# Altium PCB FPW1-0-2.PcbDoc (part 9 of 11)
Units mm, origin at the board's own origin, x right, y up, seen from the top; angles counter-clockwise.
Board outline 85 x 56 mm, 4 copper layers (Top Layer, GND_Plane, 3V3_Plane, Bottom Layer); 182 components, 321 nets, 1106 pads, 360 vias.
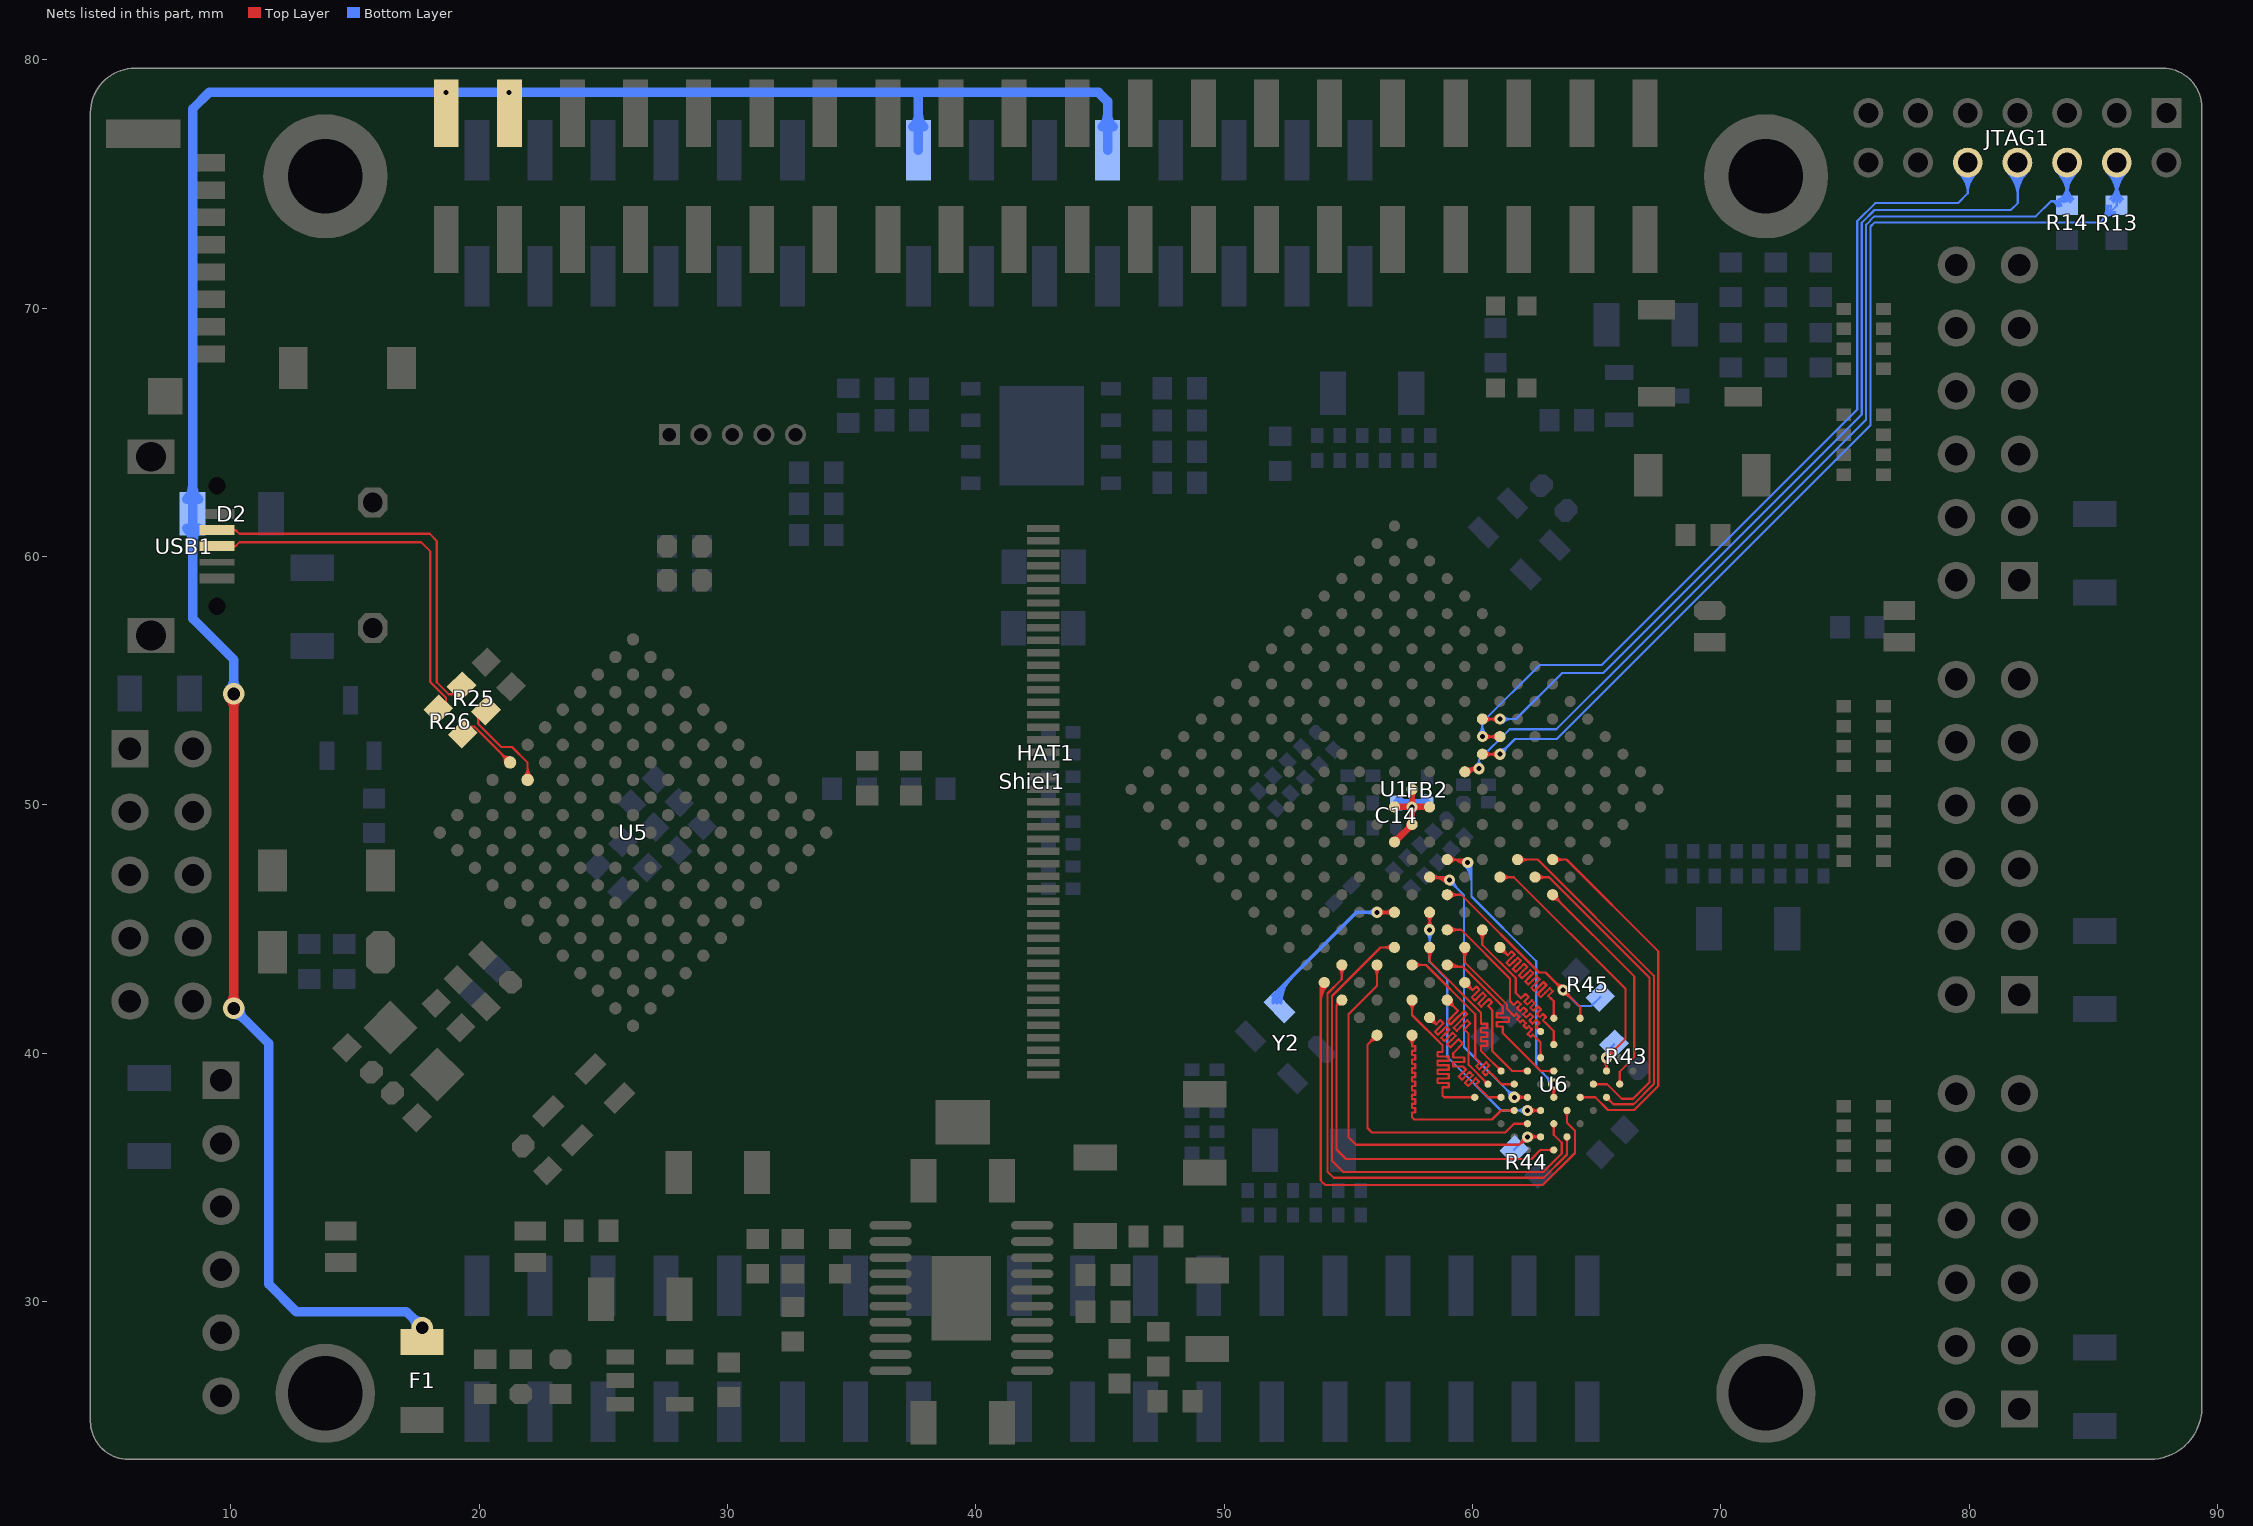
[diagram p11: the nets of this part, all layers, seen from the top]

## Via types
v1: diameter 0.45, hole 0.2, Top Layer to Bottom Layer, tented both sides, 280 vias
v2: diameter 0.61, hole 0.33, Top Layer to Bottom Layer, tented both sides, 40 vias
v3: diameter 0.403, hole 0.2, Top Layer to Bottom Layer, tented both sides, 15 vias
v4: diameter 0.5, hole 0.2, Top Layer to Bottom Layer, tented both sides, 12 vias
v5: diameter 0.864, hole 0.508, Top Layer to Bottom Layer, tented both sides, 11 vias
v6: diameter 0.864, hole 0.356, Top Layer to Bottom Layer, tented both sides, 1 vias
v7: diameter 0.864, hole 0.381, Top Layer to Bottom Layer, tented both sides, 1 vias

## Nets (pads, with @x,y where several pads share a name; then routed paths per layer and width w, separated by ;. In a path a pad name is that pad's centre, name@x,y a point inside that pad or via, vN(x,y) a via of type N, cw(c..) or ccw(c..) an arc to the next point about the centre after c; other vN are vias at no path point) (continued)
SRAM-A12: U1.B1 U6.G3 | length 11.2
  Top Layer w0.089: U1.B1@57.438,40.603 cw(c57.13,40.295) 57.565,40.295 cw(c58.001,40.295) U1.B1@57.693,40.603 ; U1.B1@57.565,40.731 57.565,40.642 57.565,40.464 ; U6.G3@61.609,37.629 ccw(c61.438,37.457) 61.438,37.7 ccw(c61.438,37.942) U6.G3@61.609,37.771 ; U6.G3@61.68,37.7 61.144,37.7 60.785,37.341 57.772,37.341 57.744,37.341 57.655,37.341 57.565,37.431 57.565,37.442 57.565,37.619 57.692,37.619 57.692,37.797 57.565,37.797 57.565,37.975 57.692,37.975 57.692,38.153 57.565,38.153 57.565,38.331 57.692,38.331 57.692,38.508 57.565,38.508 57.565,38.686 57.692,38.686 57.692,38.864 57.565,38.864 57.565,39.042 57.692,39.042 57.692,39.22 57.565,39.22 57.565,39.397 57.692,39.397 57.692,39.575 57.565,39.575 57.565,39.753 57.692,39.753 57.692,39.931 57.565,39.931 57.565,40.109 57.692,40.109 57.692,40.286 57.565,40.286 57.565,40.464 ; 57.565,40.464 cw(c57.672,40.464) 57.632,40.563 ccw(c57.672,40.464) 57.565,40.464 ; 57.565,40.464 ccw(c57.459,40.464) 57.498,40.563 cw(c57.459,40.464) 57.565,40.464
SRAM-A13: U1.A2 U6.G4 | length 11.6
  Top Layer w0.089: U1.A2@55.971,40.731 cw(c55.535,40.731) 55.843,40.423 cw(c56.151,40.114) U1.A2@56.151,40.55 ; U1.A2@56.151,40.731 55.767,40.347 55.767,36.993 55.944,36.817 61.316,36.817 61.668,37.169 U6.G4@62.211,37.169 ; U6.G4@62.14,37.098 ccw(c61.968,36.927) 61.968,37.169 ccw(c61.968,37.412) U6.G4@62.14,37.241
SRAM-A14: U1.G5 U6.F3 | length 16
  Top Layer w0.089: U1.G5@58.273,47.095 58.95,47.095 v1(59.068,46.977) ; U1.G5@58.348,47.095 cw(c58.348,46.258) v1@58.94,46.85 ; U1.G5@58.4,46.967 cw(c58.708,46.659) 58.708,47.095 cw(c58.708,47.531) U1.G5@58.4,47.223 ; 58.563,47.095 cw(c58.563,46.472) v1@59.003,46.912 ; 58.777,47.095 cw(c58.777,46.687) v1@59.066,46.975 ; v1(61.68,38.23) U6.F3@62.211,38.23 ; v1@61.808,38.102 cw(c62.116,37.794) 62.116,38.23 cw(c62.116,38.666) v1@61.808,38.358 ; U6.F3@62.14,38.159 ccw(c61.968,37.987) 61.968,38.23 ccw(c61.968,38.473) U6.F3@62.14,38.301
  Bottom Layer w0.089: v1@59.056,46.966 59.652,46.37 59.652,40.259 v1(61.68,38.23) ; v1@59.068,46.797 cw(c59.068,46.416) 59.337,46.685 ; v1@59.159,46.977 ccw(c59.436,46.977) 59.24,46.782 ; v1@59.248,46.977 ccw(c59.739,46.977) 59.392,46.63 ; v1@61.5,38.23 ccw(c61.064,38.23) 61.372,38.538 ccw(c61.68,38.847) v1@61.68,38.411
SRAM-A15: U1.F4 U6.F4 | length 14.6
  Top Layer w0.089: v1@58.145,45.101 ccw(c57.837,45.409) 58.273,45.409 ccw(c58.708,45.409) v1@58.4,45.101 ; U1.F4@58.145,45.553 cw(c57.837,45.245) 58.273,45.245 cw(c58.708,45.245) U1.F4@58.4,45.553 ; v1(58.273,44.974) U1.F4@58.273,45.681 ; v1(62.211,37.7) U6.F4@62.741,37.7 ; v1@62.338,37.572 cw(c62.647,37.264) 62.647,37.7 cw(c62.647,38.136) v1@62.338,37.827 ; U6.F4@62.67,37.629 ccw(c62.498,37.457) 62.498,37.7 ccw(c62.498,37.942) U6.F4@62.67,37.771
  Bottom Layer w0.089: v1@58.145,44.846 cw(c57.837,44.538) 58.273,44.538 cw(c58.708,44.538) v1@58.4,44.846 ; v1(58.273,44.974) 58.273,43.683 58.98,42.976 58.98,39.864 61.144,37.7 v1(62.211,37.7) ; v1@62.083,37.572 ccw(c61.775,37.264) 61.775,37.7 ccw(c61.775,38.136) v1@62.083,37.827
SRAM-A16: U1.H5 U6.E4 | length 17.4
  Top Layer w0.089: U1.H5@58.98,47.802 59.691,47.802 v1(59.804,47.688) ; U1.H5@59.095,47.802 cw(c59.095,46.979) v1@59.677,47.561 ; U1.H5@59.107,47.674 cw(c59.416,47.366) 59.416,47.802 cw(c59.416,48.238) U1.H5@59.107,47.93 ; 59.309,47.802 cw(c59.309,47.193) v1@59.739,47.624 ; 59.524,47.802 cw(c59.524,47.408) v1@59.802,47.687 ; v1@63.144,38.633 cw(c62.836,38.325) 63.271,38.325 cw(c63.707,38.325) v1@63.399,38.633 ; U6.E4@63.2,38.301 ccw(c63.029,38.473) 63.271,38.473 ccw(c63.514,38.473) U6.E4@63.343,38.301 ; U6.E4@63.271,38.23 v1(63.271,38.76)
  Bottom Layer w0.089: v1@59.677,47.561 cw(c59,46.885) 59.957,46.885 ; v1@59.739,47.624 cw(c59.215,47.099) 59.957,47.099 ; v1@59.802,47.687 cw(c59.43,47.314) 59.957,47.314 ; v1(59.804,47.688) 59.957,47.536 59.957,46.317 62.56,43.713 62.56,39.472 v1(63.271,38.76) ; v1@63.091,38.76 ccw(c62.655,38.76) 62.963,39.069 ccw(c63.271,39.377) v1@63.271,38.941
SRAM-A17: U1.E2 U6.D3 | length 9.6
  Top Layer w0.089: U1.E2@58.98,43.559 59.052,43.487 59.613,43.487 61.214,41.886 61.214,41.797 61.214,41.619 60.973,41.619 60.973,41.441 61.468,41.441 61.468,41.263 60.973,41.263 60.973,41.086 61.214,41.086 61.214,40.818 62.741,39.291 U6.D3@63.271,39.291 ; U1.E2@59.044,43.624 ccw(c59.377,43.956) 59.377,43.487 ; U1.E2@59.107,43.432 cw(c59.24,43.299) 59.24,43.487 ; U1.E2@59.107,43.687 ccw(c59.591,44.171) 59.591,43.487 ; U6.D3@63.2,39.22 ccw(c63.029,39.048) 63.029,39.291 ccw(c63.029,39.533) U6.D3@63.2,39.362
SRAM-A18: U1.C2 U6.H1 | length 10.4
  Top Layer w0.089: U1.C2@57.438,42.017 cw(c57.13,41.709) 57.565,41.709 cw(c58.001,41.709) U1.C2@57.693,42.017 ; U1.C2@57.565,42.145 57.565,41.545 58.788,40.322 58.788,40.056 58.585,40.056 58.585,39.878 59.042,39.878 59.042,39.7 58.585,39.7 58.585,39.522 59.042,39.522 59.042,39.345 58.585,39.345 58.585,39.167 59.042,39.167 59.042,38.989 58.585,38.989 58.585,38.811 59.042,38.811 59.042,38.633 58.788,38.633 58.788,38.303 58.861,38.23 U6.H1@60.089,38.23 ; U6.H1@60.018,38.159 ccw(c59.847,37.987) 59.847,38.23 ccw(c59.847,38.473) U6.H1@60.018,38.301
SRAM-A19: U1.C1 U6.G2 | length 12
  Top Layer w0.089: U1.C1@58.273,41.438 58.535,41.175 ; U1.C1@58.294,41.259 cw(c58.329,40.969) 58.535,41.175 ; U1.C1@58.452,41.416 ccw(c58.741,41.382) 58.535,41.175 ; U6.G2@61.079,38.159 ccw(c60.907,37.987) 60.907,38.23 ccw(c60.907,38.473) U6.G2@61.079,38.301 ; U6.G2@61.15,38.23 60.639,38.23 60.127,38.742 60.257,38.872 60.131,38.997 60.002,38.868 59.822,38.688 59.696,38.814 60.006,39.123 59.88,39.249 59.75,39.119 59.571,38.94 59.445,39.065 59.733,39.353 59.611,39.474 59.22,39.474 59.22,39.652 59.665,39.652 59.665,39.83 59.22,39.83 59.22,40.008 59.608,40.396 59.436,40.568 59.11,40.242 58.984,40.367 59.164,40.547 59.321,40.704 59.195,40.829 59.038,40.673 58.864,40.498 58.738,40.624 58.912,40.798 59.069,40.955 58.943,41.081 58.787,40.924 58.612,40.75 58.487,40.876 58.826,41.215 58.7,41.341 58.535,41.175
SRAM-DQ0: U1.K1 U6.B6 | length 10.3
  Top Layer w0.089: U1.K1@63.222,46.207 cw(c63.222,45.771) 63.53,46.08 cw(c63.839,46.388) U1.K1@63.403,46.388 ; U1.K1@63.222,46.388 66.51,43.1 66.51,39.853 65.923,39.266 U6.B6@65.923,38.76 ; U6.B6@65.852,38.831 ccw(c65.68,39.003) 65.923,39.003 ccw(c66.166,39.003) U6.B6@65.994,38.831
SRAM-DQ1: U1.K2 U6.C5 | length 14.3
  Top Layer w0.089: U1.K2@62.515,47.095 63.076,47.095 67.122,43.048 67.122,38.837 66.461,38.176 66.002,38.176 65.418,38.76 U6.C5@64.862,38.76 ; U1.K2@62.643,46.967 cw(c62.951,46.659) 62.951,47.095 cw(c62.951,47.531) U1.K2@62.643,47.223 ; U6.C5@64.933,38.689 cw(c65.105,38.518) 65.105,38.76 cw(c65.105,39.003) U6.C5@64.933,38.832
SRAM-DQ2: U1.K3 U6.C6 | length 15.2
  Top Layer w0.089: U1.K3@61.808,47.802 62.62,47.802 67.3,43.122 67.3,38.764 66.484,37.948 65.675,37.948 U6.C6@65.393,38.23 ; U1.K3@61.936,47.674 cw(c62.244,47.366) 62.244,47.802 cw(c62.244,48.238) U1.K3@61.936,47.93 ; U6.C6@65.393,38.13 cw(c65.393,37.887) 65.564,38.058 cw(c65.736,38.23) U6.C6@65.493,38.23
SRAM-DQ3: U1.L2 U6.D5 | length 16
  Top Layer w0.089: U1.L2@63.222,47.802 63.783,47.802 67.478,44.107 67.478,38.69 66.507,37.719 65.456,37.719 64.945,38.23 U6.D5@64.332,38.23 ; U1.L2@63.35,47.674 cw(c63.658,47.366) 63.658,47.802 cw(c63.658,48.238) U1.L2@63.35,47.93 ; U6.D5@64.403,38.159 cw(c64.575,37.987) 64.575,38.23 cw(c64.575,38.473) U6.D5@64.403,38.301
SRAM-DQ4: U1.A5 U6.E5 | length 22.8
  Top Layer w0.089: 53.886,42.069 cw(c54.813,42.069) U1.A5@54.158,42.725 ; 53.886,42.284 cw(c54.598,42.284) U1.A5@54.095,42.787 ; 53.886,42.498 cw(c54.384,42.498) U1.A5@54.032,42.85 ; U1.A5@54.03,42.852 53.886,42.708 53.886,34.877 54.066,34.696 62.827,34.696 64.122,35.992 64.122,36.881 63.802,37.201 U6.E5@63.802,37.7 ; U6.E5@63.731,37.629 cw(c63.559,37.457) 63.802,37.457 cw(c64.044,37.457) U6.E5@63.873,37.629
SRAM-DQ5: U1.D4 U6.F5 | length 22.1
  Top Layer w0.089: U1.D4@56.731,44.139 ccw(c56.422,43.831) 56.422,44.266 ccw(c56.422,44.702) U1.D4@56.731,44.394 ; U1.D4@56.858,44.266 56.298,44.266 54.341,42.309 54.341,35.677 54.788,35.23 62.852,35.23 63.588,35.965 63.588,36.405 63.271,36.722 U6.F5@63.271,37.169 ; U6.F5@63.2,37.098 cw(c63.029,36.927) 63.271,36.927 cw(c63.514,36.927) U6.F5@63.342,37.098
SRAM-DQ6: U1.B5 U6.F6 | length 20.5
  Top Layer w0.089: U1.B5@54.609,43.432 cw(c54.301,43.123) 54.737,43.123 cw(c55.173,43.123) U1.B5@54.865,43.432 ; U1.B5@54.737,43.559 54.737,42.985 54.163,42.41 54.163,35.233 54.407,34.989 62.862,34.989 63.802,35.928 U6.F6@63.802,36.639 ; U6.F6@63.731,36.568 cw(c63.559,36.396) 63.802,36.396 cw(c64.044,36.396) U6.F6@63.873,36.568
SRAM-DQ7: U1.A4 U6.G6 | length 15.9
  Top Layer w0.089: U1.A4@54.564,42.095 cw(c54.402,42.048) 54.521,41.929 ; U1.A4@54.687,41.972 ccw(c54.64,41.811) 54.521,41.929 ; U1.A4@54.737,42.145 54.521,41.929 ; U6.G6@63.2,36.038 ccw(c63.029,35.866) 63.029,36.109 ccw(c63.029,36.351) U6.G6@63.2,36.18 ; U6.G6@63.271,36.109 62.728,36.109 62.37,35.75 54.902,35.75 54.521,36.131 54.521,41.929
SRAM-DQ8: U1.G1 U6.B1 | length 11.6
  Top Layer w0.089: U1.G1@61.101,44.086 cw(c61.101,43.65) 61.409,43.958 cw(c61.717,44.266) U1.G1@61.282,44.266 ; U1.G1@61.101,44.266 61.164,44.204 61.29,44.078 ; U6.B1@63.2,41.483 ccw(c63.029,41.655) 63.271,41.655 ccw(c63.514,41.655) U6.B1@63.342,41.483 ; U6.B1@63.271,41.412 63.271,42.062 ; 63.271,42.007 63.271,42.096 63.175,42.192 63.05,42.318 63.229,42.497 63.104,42.623 62.924,42.443 62.744,42.264 62.619,42.39 62.798,42.569 62.978,42.749 62.852,42.874 62.673,42.695 62.493,42.515 62.367,42.641 62.547,42.821 62.705,42.979 62.579,43.104 62.421,42.946 62.246,42.771 62.12,42.897 62.295,43.072 62.45,43.227 62.324,43.352 62.17,43.198 61.994,43.022 61.869,43.148 62.044,43.323 62.199,43.478 62.073,43.604 61.918,43.449 61.743,43.274 61.617,43.4 61.792,43.575 61.947,43.73 61.821,43.855 61.667,43.701 61.491,43.525 61.366,43.651 61.541,43.826 61.696,43.981 61.57,44.107 61.415,43.952 61.29,44.078 ; 61.29,44.078 cw(c61.365,44.153) 61.267,44.195 ccw(c61.365,44.153) 61.29,44.078 ; 61.29,44.078 ccw(c61.214,44.002) 61.172,44.1 cw(c61.214,44.002) 61.29,44.078
SRAM-DQ9: U1.F3 U6.C1 | length 8.8
  Top Layer w0.089: U1.F3@58.98,44.974 59.54,44.974 61.506,43.008 61.506,42.106 61.662,41.95 61.811,42.1 61.937,41.974 61.787,41.825 61.913,41.699 62.064,41.85 62.19,41.724 62.039,41.573 62.165,41.447 62.316,41.598 62.441,41.473 62.29,41.322 62.416,41.196 62.567,41.347 62.693,41.221 62.542,41.07 62.73,40.882 U6.C1@62.741,40.882 ; U1.F3@59.107,44.846 cw(c59.416,44.538) 59.416,44.974 cw(c59.416,45.409) U1.F3@59.107,45.101 ; 62.551,41.061 ccw(c62.741,41.251) U6.C1@62.741,40.982 ; 62.577,41.035 cw(c62.424,40.882) U6.C1@62.641,40.882
SRAM-DQ10: U1.G2 U6.C2 | length 8.8
  Top Layer w0.089: U1.G2@60.266,44.846 cw(c59.958,44.538) 60.394,44.538 cw(c60.83,44.538) U1.G2@60.522,44.846 ; U1.G2@60.394,44.974 60.394,44.371 61.735,43.031 61.735,42.494 ; 61.735,42.52 61.735,42.431 61.826,42.34 61.951,42.214 62.131,42.394 62.257,42.268 62.077,42.088 62.203,41.963 62.382,42.142 62.508,42.017 62.328,41.837 62.454,41.711 62.634,41.891 62.76,41.765 62.58,41.585 62.706,41.46 62.833,41.587 62.959,41.462 62.831,41.334 62.957,41.208 63.083,41.083 63.209,40.957 63.271,40.894 U6.C2@63.271,40.351 ; U6.C2@63.2,40.422 ccw(c63.029,40.594) 63.271,40.594 ccw(c63.514,40.594) U6.C2@63.343,40.422
SRAM-DQ11: U1.F2 U6.D2 | length 7.8
  Top Layer w0.089: U1.F2@59.559,44.139 cw(c59.251,43.831) 59.687,43.831 cw(c60.123,43.831) U1.F2@59.814,44.139 ; U1.F2@59.687,44.266 59.687,43.664 61.392,41.959 61.392,41.783 61.672,41.502 61.762,41.592 61.888,41.466 61.798,41.377 61.924,41.251 62.014,41.341 62.139,41.215 62.05,41.125 62.175,40.999 62.265,41.089 62.391,40.964 62.301,40.874 62.211,40.784 62.337,40.658 62.427,40.748 62.741,40.434 U6.D2@62.741,39.821 ; U6.D2@62.67,39.892 ccw(c62.498,40.064) 62.741,40.064 ccw(c62.984,40.064) U6.D2@62.812,39.892
SRAM-DQ12: U1.E1 U6.E2 | length 8.7
  Top Layer w0.089: U1.E1@59.687,42.672 cw(c59.687,42.236) 59.995,42.544 cw(c60.303,42.852) U1.E1@59.867,42.852 ; U1.E1@59.687,42.852 59.75,42.789 59.875,42.664 ; U6.E2@62.14,39.22 ccw(c61.968,39.048) 61.968,39.291 ccw(c61.968,39.533) U6.E2@62.14,39.362 ; U6.E2@62.211,39.291 61.598,39.291 60.795,40.094 60.795,41.744 60.68,41.859 60.63,41.909 60.784,42.064 60.659,42.19 60.504,42.035 60.349,41.88 60.224,42.006 60.378,42.161 60.533,42.315 60.407,42.441 60.253,42.286 60.098,42.132 59.972,42.258 60.127,42.412 60.281,42.567 60.156,42.693 60.001,42.538 59.875,42.664 ; 59.875,42.664 cw(c59.951,42.739) 59.853,42.781 ccw(c59.951,42.739) 59.875,42.664 ; 59.875,42.664 ccw(c59.8,42.588) 59.758,42.686 cw(c59.8,42.588) 59.875,42.664
SRAM-DQ13: U1.D3 U6.F2 | length 9.4
  Top Layer w0.089: U1.D3@57.565,43.559 58.126,43.559 60.109,41.576 60.109,39.827 60.298,39.639 60.145,39.486 60.271,39.361 60.423,39.513 60.55,39.639 60.676,39.514 60.549,39.387 60.397,39.235 60.522,39.109 60.675,39.261 60.801,39.136 61.176,38.76 U6.F2@61.68,38.76 ; U1.D3@57.693,43.432 cw(c58.001,43.123) 58.001,43.559 cw(c58.001,43.995) U1.D3@57.693,43.687 ; U6.F2@61.609,38.689 ccw(c61.438,38.518) 61.438,38.76 ccw(c61.438,39.003) U6.F2@61.609,38.831
SRAM-DQ14: U1.E3 U6.F1 | length 8.8
  Top Layer w0.089: U1.E3@58.145,44.139 cw(c57.837,43.831) 58.273,43.831 cw(c58.708,43.831) U1.E3@58.4,44.139 ; U1.E3@58.273,44.266 58.273,43.706 60.338,41.641 60.338,41.552 60.338,41.374 60.338,41.196 60.592,41.196 60.592,41.018 60.338,41.018 60.338,40.84 60.592,40.84 60.592,40.663 60.338,40.663 60.338,40.485 60.592,40.485 60.592,40.307 60.338,40.307 60.338,40.129 60.338,40.103 60.401,40.04 60.476,39.965 U6.F1@61.15,39.291 ; U6.F1@61.05,39.291 ccw(c60.807,39.291) 60.978,39.462 ccw(c61.15,39.634) U6.F1@61.15,39.391
SRAM-DQ15: U1.D1 U6.G1 | length 8.1
  Top Layer w0.089: U1.D1@58.98,41.965 cw(c58.98,41.529) 59.288,41.837 cw(c59.596,42.145) U1.D1@59.16,42.145 ; U1.D1@58.98,42.145 59.413,41.712 58.989,41.287 59.114,41.161 59.294,41.341 59.662,41.709 59.788,41.583 59.24,41.036 59.366,40.91 59.545,41.089 59.787,41.331 59.912,41.205 59.671,40.964 59.842,40.792 59.842,39.538 U6.G1@60.62,38.76 ; U6.G1@60.519,38.76 ccw(c60.276,38.76) 60.448,38.932 ccw(c60.62,39.104) U6.G1@60.62,38.861
SRAM_CS: R43.1 U1.J3 U6.B5 | length 15.7
  Top Layer w0.089: U1.J3@61.101,47.095 61.664,47.095 66.154,42.604 66.154,40.589 65.393,39.828 v1(65.393,39.821) U6.B5@65.393,39.291 ; U1.J3@61.229,46.967 cw(c61.537,46.659) 61.537,47.095 cw(c61.537,47.531) U1.J3@61.229,47.223 ; v1@65.265,39.693 cw(c64.957,39.385) 65.393,39.385 cw(c65.829,39.385) v1@65.52,39.693 ; U6.B5@65.322,39.362 ccw(c65.15,39.533) 65.393,39.533 ccw(c65.635,39.533) U6.B5@65.464,39.362 ; v1@65.393,40.002 ccw(c65.393,40.422) 65.69,40.125 ; v1@65.484,39.821 cw(c65.721,39.821) 65.554,39.989 ; v1@65.573,39.821 cw(c66.025,39.821) 65.706,40.14
  Bottom Layer w0.089: v1@65.31,39.798 cw(c65.559,39.868) 65.376,40.052 ; v1@65.338,39.993 ccw(c65.314,40.068) R43.1@65.393,40.068 ; v1(65.393,39.821) R43.1@65.393,40.068 ; v1@65.395,39.822 cw(c65.726,39.915) R43.1@65.483,40.159 ; R43.1@65.448,39.993 cw(c65.472,40.068) R43.1@65.393,40.068 ; v1@65.481,39.846 cw(c65.893,39.963) R43.1@65.59,40.266 ; R43.1@65.566,39.87 cw(c66.06,40.01) R43.1@65.697,40.373 R43.1@65.393,40.068
SRAM_OE: R45.1 U1.G4 U6.A2 | length 13.1
  Top Layer w0.089: U1.G4@58.98,46.388 59.54,46.388 62.673,43.255 62.936,43.255 64.332,41.86 U6.A2@64.332,41.412 ; U1.G4@59.107,46.26 cw(c59.416,45.952) 59.416,46.388 cw(c59.416,46.824) U1.G4@59.107,46.515 ; 63.322,42.87 ccw(c63.64,43.188) v1@63.64,42.738 ; 63.336,42.856 cw(c63.037,42.558) v1@63.459,42.558 ; 63.473,42.718 ccw(c63.64,42.885) v1@63.64,42.649 ; v1@63.64,42.377 cw(c63.64,41.955) 63.938,42.254 ; v1@63.731,42.558 ccw(c63.967,42.558) 63.8,42.391 ; v1@63.82,42.558 ccw(c64.27,42.558) 63.952,42.24 ; U6.A2@64.261,41.483 ccw(c64.089,41.655) 64.332,41.655 ccw(c64.575,41.655) U6.A2@64.403,41.483
  Bottom Layer w0.089: v1@63.64,42.377 cw(c63.64,41.941) 63.948,42.249 cw(c64.256,42.558) v1@63.82,42.558 ; v1(63.64,42.558) 64.287,41.91 64.783,41.91 R45.1@65.138,42.266
SRAM_WR: R44.1 U1.C4 U6.G5 | length 19.7
  Top Layer w0.089: U1.C4@56.024,43.432 cw(c55.715,43.123) 56.151,43.123 cw(c56.587,43.123) U1.C4@56.279,43.432 ; U1.C4@56.151,43.559 56.151,42.725 55.004,41.577 55.004,36.627 55.308,36.323 61.875,36.323 62.191,36.639 v1(62.211,36.639) U6.G5@62.741,36.639 ; 61.875,36.323 cw(c62.203,35.994) v1@62.209,36.459 ; 61.916,36.364 ccw(c61.641,36.639) v1@62.03,36.639 ; 62.024,36.472 cw(c62.207,36.29) v1@62.21,36.547 ; v1@62.338,36.511 cw(c62.647,36.203) 62.647,36.639 cw(c62.647,37.075) v1@62.338,36.767 ; U6.G5@62.67,36.568 ccw(c62.498,36.396) 62.498,36.639 ccw(c62.498,36.882) U6.G5@62.67,36.71
  Bottom Layer w0.089: R44.1@61.672,36.118 62.192,36.639 v1(62.211,36.639) ; R44.1@61.871,36.318 cw(c62.211,35.978) v1@62.211,36.459 ; R44.1@61.916,36.363 ccw(c61.639,36.639) v1@62.03,36.639 ; 62.023,36.469 cw(c62.211,36.281) v1@62.211,36.547
TCK: JTAG1.6 R14.1 U1.L7 | length 53.7
  Top Layer w0.089: U1.L7@59.687,51.337 59.81,51.46 v1(60.261,51.46) ccw(c60.261,50.945) U1.L7@59.836,51.236 ; U1.L7@59.689,51.336 cw(c59.925,51.175) 59.925,51.46 ; U1.L7@59.762,51.286 cw(c60.093,51.06) v1@60.093,51.46 ; v1@60.082,51.482 cw(c59.976,51.495) 60.004,51.391 cw(c60.031,51.288) v1@60.117,51.352 ; v1@60.098,51.537 cw(c59.913,51.624) 59.966,51.426 cw(c59.998,51.306) v1@60.106,51.369 ; v1@60.134,51.333 ccw(c59.826,51.025) 59.826,51.46 ccw(c59.826,51.896) v1@60.134,51.588
  Bottom Layer w0.089: v1@60.155,51.606 ccw(c60.002,51.816) 60.261,51.816 ; v1(60.261,51.46) 60.261,51.816 ; v1@60.368,51.606 cw(c60.521,51.816) 60.261,51.816 ; 66.218,55.891 63.375,53.048 61.493,53.048 60.261,51.816 ; 66.218,55.893 75.844,65.519 75.844,73.365 76.177,73.698 82.677,73.698 83.287,74.308 ; 83.389,74.308 cw(c83.389,74.075) R14.1@83.62,74.107 ; 83.422,74.308 ccw(c83.422,74.606) R14.1@83.633,74.396 ; R14.1@83.491,74.308 cw(c83.491,74.089) R14.1@83.708,74.12 ; R14.1@83.532,74.095 ccw(c83.287,74.061) 83.287,74.308 ; JTAG1.6@83.542,75.471 cw(c82.594,74.522) 83.935,74.522 cw(c85.276,74.522) JTAG1.6@84.328,75.471 ; JTAG1.6@83.605,75.534 cw(c82.808,74.737) 83.935,74.737 cw(c85.061,74.737) JTAG1.6@84.265,75.534 ; JTAG1.6@83.668,75.597 cw(c83.023,74.952) 83.935,74.952 cw(c84.847,74.952) JTAG1.6@84.202,75.597 ; R14.1@83.683,74.396 ccw(c83.075,75.004) 83.935,75.004 ; JTAG1.6@83.731,75.659 cw(c83.237,75.166) 83.935,75.166 cw(c84.632,75.166) JTAG1.6@84.139,75.659 ; R14.1@83.746,74.333 ccw(c83.289,74.789) 83.935,74.789 ; R14.1@83.809,74.27 ccw(c83.504,74.574) 83.935,74.574 ; 83.935,74.572 ccw(c84.362,74.572) R14.1@84.06,74.27 ; 83.935,74.787 ccw(c84.577,74.787) R14.1@84.123,74.333 ; 83.935,75.001 ccw(c84.791,75.001) R14.1@84.186,74.396 ; JTAG1.6@83.935,75.864 83.935,74.308 83.287,74.308
TDI_FPGA: JTAG1.10 U1.N7 | length 43
  Top Layer w0.089: v1(60.394,52.752) U1.N7@61.101,52.752 ; v1@60.522,52.624 cw(c60.83,52.316) 60.83,52.752 cw(c60.83,53.188) v1@60.522,52.879 ; U1.N7@60.973,52.624 ccw(c60.665,52.316) 60.665,52.752 ccw(c60.665,53.188) U1.N7@60.973,52.879
  Bottom Layer w0.089: v1@60.266,52.879 ccw(c59.958,53.188) 60.394,53.188 ccw(c60.83,53.188) v1@60.522,52.879 ; v1(60.394,52.752) 60.394,53.333 62.7,55.639 65.202,55.639 75.489,65.926 75.489,73.513 76.208,74.231 79.54,74.231 79.935,74.626 ; JTAG1.10@79.566,75.449 cw(c78.834,74.626) 79.935,74.626 ; JTAG1.10@79.625,75.515 cw(c79.011,74.824) 79.935,74.824 cw(c80.859,74.824) JTAG1.10@80.245,75.515 ; JTAG1.10@79.684,75.581 cw(c79.187,75.022) 79.935,75.022 cw(c80.683,75.022) JTAG1.10@80.186,75.581 ; JTAG1.10@79.743,75.648 cw(c79.363,75.22) 79.935,75.22 cw(c80.507,75.22) JTAG1.10@80.127,75.648 ; JTAG1.10@79.935,75.864 79.935,74.626 ; JTAG1.10@80.304,75.449 ccw(c81.035,74.626) 79.935,74.626
TDO_FPGA: JTAG1.8 U1.N8 | length 44.8
  Top Layer w0.089: U1.N8@60.394,53.459 v1(61.101,53.459) ; U1.N8@60.522,53.331 cw(c60.83,53.023) 60.83,53.459 cw(c60.83,53.895) U1.N8@60.522,53.586 ; v1@60.973,53.331 ccw(c60.665,53.023) 60.665,53.459 ccw(c60.665,53.895) v1@60.973,53.586
  Bottom Layer w0.089: v1(61.101,53.459) 61.752,53.459 63.602,55.308 65.253,55.308 75.667,65.722 75.667,73.439 76.18,73.952 81.674,73.952 81.953,74.231 81.953,75.845 JTAG1.8@81.935,75.864 ; v1@61.229,53.331 cw(c61.537,53.023) 61.537,53.459 cw(c61.537,53.895) v1@61.229,53.586 ; JTAG1.8@81.542,75.471 cw(c80.549,74.478) 81.953,74.478 ; JTAG1.8@81.605,75.534 cw(c80.764,74.693) 81.953,74.693 ; JTAG1.8@81.668,75.597 cw(c80.979,74.908) 81.953,74.908 ; JTAG1.8@81.731,75.659 cw(c81.193,75.122) 81.953,75.122 ; 81.953,74.567 cw(c83.232,74.567) JTAG1.8@82.328,75.471 ; 81.953,74.781 cw(c83.017,74.781) JTAG1.8@82.265,75.534 ; 81.953,74.996 cw(c82.803,74.996) JTAG1.8@82.202,75.597 ; 81.953,75.211 cw(c82.588,75.211) JTAG1.8@82.139,75.659
TMS: JTAG1.4 R13.1 U1.M7 | length 55.5
  Top Layer w0.089: U1.M7@60.394,52.045 v1(61.101,52.045) ; U1.M7@60.522,51.917 cw(c60.83,51.609) 60.83,52.045 cw(c60.83,52.48) U1.M7@60.522,52.172 ; v1@60.973,51.917 ccw(c60.665,51.609) 60.665,52.045 ccw(c60.665,52.48) v1@60.973,52.172
  Bottom Layer w0.089: v1(61.101,52.045) 61.71,52.654 63.385,52.654 76.022,65.291 76.022,73.292 76.187,73.457 85.268,73.457 ; v1@61.101,52.225 ccw(c61.101,52.661) 61.409,52.353 ccw(c61.717,52.045) v1@61.282,52.045 ; 85.403,73.592 cw(c85.878,73.116) R13.1@85.878,73.789 ; 85.409,73.598 ccw(c84.915,74.091) R13.1@85.612,74.129 ; R13.1@85.523,74.125 cw(c84.648,74.076) 85.268,73.457 ; JTAG1.4@85.542,75.471 cw(c84.594,74.522) 85.935,74.522 cw(c87.276,74.522) JTAG1.4@86.328,75.471 ; 85.549,73.738 ccw(c85.182,74.106) R13.1@85.701,74.134 ; 85.554,73.743 cw(c85.878,73.419) R13.1@85.878,73.877 ; JTAG1.4@85.605,75.534 cw(c84.808,74.737) 85.935,74.737 cw(c87.061,74.737) JTAG1.4@86.265,75.534 ; JTAG1.4@85.668,75.597 cw(c85.023,74.952) 85.935,74.952 cw(c86.847,74.952) JTAG1.4@86.202,75.597 ; R13.1@85.677,74.396 ccw(c85.054,75.018) 85.935,75.018 ; JTAG1.4@85.731,75.659 cw(c85.237,75.166) 85.935,75.166 cw(c86.632,75.166) JTAG1.4@86.139,75.659 ; R13.1@85.74,74.333 ccw(c85.269,74.804) 85.935,74.804 ; R13.1@85.803,74.27 ccw(c85.483,74.589) 85.935,74.589 ; R13.1@85.853,74.492 ccw(c85.833,74.584) 85.927,74.594 ccw(c86.05,74.608) R13.1@86.019,74.488 ; 85.935,74.557 ccw(c86.341,74.557) R13.1@86.054,74.27 ; 85.935,74.772 ccw(c86.556,74.772) R13.1@86.117,74.333 ; 85.935,74.987 ccw(c86.771,74.987) R13.1@86.18,74.396 ; JTAG1.4@85.935,75.864 85.935,74.124 85.268,73.457
USB0_N: R25.1 USB1.2 | length 16.5
  Top Layer w0.089: USB1.2@9.449,61.072 10.198,61.072 ; USB1.2@10.089,61.004 cw(c10.198,60.95) 10.198,61.072 ; USB1.2@10.089,61.14 ccw(c10.198,61.194) 10.198,61.072 ; R25.1@18.969,54.543 cw(c18.915,54.504) 18.962,54.458 ; R25.1@19.047,54.464 ccw(c19.009,54.411) 18.962,54.458 ; R25.1@19.292,54.787 18.962,54.458 ; 10.198,61.072 10.352,60.918 18.012,60.918 18.301,60.63 18.301,54.94 18.783,54.458 18.962,54.458
USB0_P: R26.1 USB1.3 | length 15.8
  Top Layer w0.089: USB1.3@9.449,60.422 10.198,60.422 ; USB1.3@10.089,60.354 cw(c10.198,60.3) 10.198,60.422 ; USB1.3@10.089,60.49 ccw(c10.198,60.544) 10.198,60.422 ; R26.1@18.352,53.86 18.669,54.178 18.669,54.318 18.034,54.953 18.034,60.211 17.669,60.576 10.352,60.576 10.198,60.422
USB0D_N: R25.2 U5.H2 | length 5.2
  Top Layer w0.089: R25.2@20.282,53.798 19.964,53.48 19.964,53.264 20.892,52.337 21.323,52.337 21.957,51.703 U5.H2@21.957,51.008 ; U5.H2@21.811,51.153 ccw(c21.46,51.504) 21.957,51.504 ccw(c22.453,51.504) U5.H2@22.102,51.153 ; U5.H2@21.874,51.091 ccw(c21.675,51.29) 21.957,51.29 ccw(c22.238,51.29) U5.H2@22.039,51.091
USB0D_P: R26.2 U5.H1 | length 3.8
  Top Layer w0.089: R26.2@19.342,52.87 19.634,53.162 19.803,53.162 U5.H1@21.25,51.715 ; U5.H1@21.044,51.715 ccw(c20.548,51.715) 20.899,52.066 ccw(c21.25,52.417) U5.H1@21.25,51.921 ; U5.H1@21.133,51.715 ccw(c20.851,51.715) 21.05,51.914 ccw(c21.25,52.114) U5.H1@21.25,51.832
VBUS: D2.2 F1.2 HAT1.2 HAT1.4 Shiel1.14 Shiel1.20 | length 106.5
  Top Layer w0.381: v5@9.951,41.979 ccw(c9.539,42.391) 10.122,42.391 ccw(c10.704,42.391) v5@10.293,41.979 ; v5@9.951,54.3 cw(c9.539,53.888) 10.122,53.888 cw(c10.704,53.888) v5@10.293,54.3 ; v5(10.122,41.808) v5(10.122,54.47)
  Bottom Layer w0.381: D2.2@8.234,61.135 cw(c7.663,60.564) 8.471,60.564 cw(c9.278,60.564) D2.2@8.707,61.135 ; D2.2@8.234,62.309 ccw(c7.663,62.88) 8.471,62.88 ccw(c9.278,62.88) D2.2@8.707,62.309 ; v5@9.951,54.641 ccw(c9.539,55.053) 10.122,55.053 ccw(c10.704,55.053) v5@10.293,54.641 ; v5@10.122,41.567 cw(c10.122,40.985) 10.534,41.396 cw(c10.946,41.808) v5@10.363,41.808 ; v5(10.122,41.808) 11.532,40.399 11.532,30.709 12.636,29.604 17.069,29.604 v5(17.716,28.956) ; v5(10.122,54.47) 10.122,55.855 8.471,57.506 D2.2@8.471,61.722 8.471,78.029 9.131,78.689 37.681,78.689 ; v5@17.475,28.956 ccw(c16.893,28.956) 17.305,29.368 ccw(c17.716,29.78) v5@17.716,29.197 ; Shiel1.14@37.47,77.299 ccw(c36.941,77.827) 37.689,77.827 ccw(c38.436,77.827) Shiel1.14@37.907,77.299 ; Shiel1.14@37.689,76.365 37.689,78.681 37.681,78.689 ; Shiel1.20@45.09,77.299 ccw(c44.561,77.827) 45.309,77.827 ccw(c46.056,77.827) Shiel1.20@45.527,77.299 ; Shiel1.20@45.309,76.365 45.309,78.326 44.945,78.689 37.681,78.689
  other v1: 18.669,78.689 21.209,78.689
XADCGND: C14.2 FB2.2 U1.G7 U1.H7 U1.H8 U1.J7 U1.J8 | length 11
  Top Layer w0.254: U1.G7@56.858,48.509 U1.H7@57.565,49.216 v1(57.565,49.923) ; U1.G7@56.858,48.607 ccw(c56.858,48.844) 57.026,48.676 ccw(c57.193,48.509) U1.G7@56.956,48.509 ; U1.H8@56.858,49.923 v1(57.565,49.923) ; U1.H8@56.928,49.854 cw(c57.095,49.687) 57.095,49.923 cw(c57.095,50.16) U1.H8@56.928,49.993 ; U1.H7@57.467,49.216 cw(c57.231,49.216) 57.398,49.049 cw(c57.565,48.882) U1.H7@57.565,49.118 ; U1.H7@57.496,49.285 ccw(c57.329,49.453) 57.565,49.453 ccw(c57.802,49.453) U1.H7@57.635,49.285 ; U1.J8@57.496,50.561 cw(c57.329,50.394) 57.565,50.394 cw(c57.802,50.394) U1.J8@57.635,50.561 ; U1.J8@57.565,50.63 v1(57.565,49.923) ; U1.J7@58.203,49.854 ccw(c58.036,49.687) 58.036,49.923 ccw(c58.036,50.16) U1.J7@58.203,49.993 ; U1.J7@58.273,49.923 v1(57.565,49.923) ; 57.329,49.923 cw(c57.329,49.687) 57.496,49.854 cw(c57.329,49.687) 57.565,49.687 cw(c57.802,49.687) 57.635,49.854 cw(c57.802,49.687) 57.802,49.923 cw(c57.802,50.16) 57.635,49.993 cw(c57.802,50.16) 57.565,50.16 cw(c57.329,50.16) 57.496,49.993 cw(c57.329,50.16) 57.329,49.923
  Bottom Layer w0.254: C14.2@57.008,50.044 cw(c57.198,49.855) 57.198,50.122 ; C14.2@57.008,50.218 ccw(c57.239,50.449) 57.239,50.122 ; v1@57.491,49.86 ccw(c56.921,49.373) 56.921,50.122 57.764,50.122 FB2.2@58.179,50.122 ccw(c58.179,49.438) v1@57.642,49.863 ; FB2.2@58.092,50.035 ccw(c57.882,49.825) 57.882,50.122 ccw(c57.882,50.419) FB2.2@58.092,50.209
XCLK: U1.E5 Y2.3 | length 10.4
  Top Layer w0.152: v1(56.151,45.681) U1.E5@56.858,45.681 ; v1@56.256,45.575 cw(c56.51,45.321) 56.51,45.681 cw(c56.51,46.04) v1@56.256,45.786 ; U1.E5@56.753,45.575 ccw(c56.499,45.321) 56.499,45.681 ccw(c56.499,46.04) U1.E5@56.753,45.786
  Bottom Layer w0.152: Y2.3@51.968,42.316 55.333,45.681 v1(56.151,45.681) ; Y2.3@51.974,42.05 cw(c52.631,42.05) 52.167,42.515 ; Y2.3@52.127,42.05 cw(c53.151,42.05) 52.427,42.775 ; Y2.3@52.279,42.05 cw(c53.671,42.05) 52.687,43.035 ; v1@56.046,45.575 ccw(c55.792,45.321) 55.792,45.681 ccw(c55.792,46.04) v1@56.046,45.786
pads on no net: HAT1.0 JTAG1.12 LS1.0 SD*1.0 Shiel1.24 SIG_TEST1.47 U3.1 U3.11 U3.20 U5.A10 U5.B10 U5.C10 U5.M5 U6.E3 U6.H6 USB1.0 USB1.4 USB1.6 USB1.7 XTAL1.1 Y1.1 Y2.1
copper on no net: | length 747.6